# Altium PCB uShake.PcbDoc
Units mm, origin at the board's own origin, x right, y up, seen from the top; angles counter-clockwise.
Board outline 55 x 55 mm, 2 copper layers (Top Layer, Bottom Layer), stack 1.571 mm thick; 88 components, 61 nets, 307 pads, 105 vias.
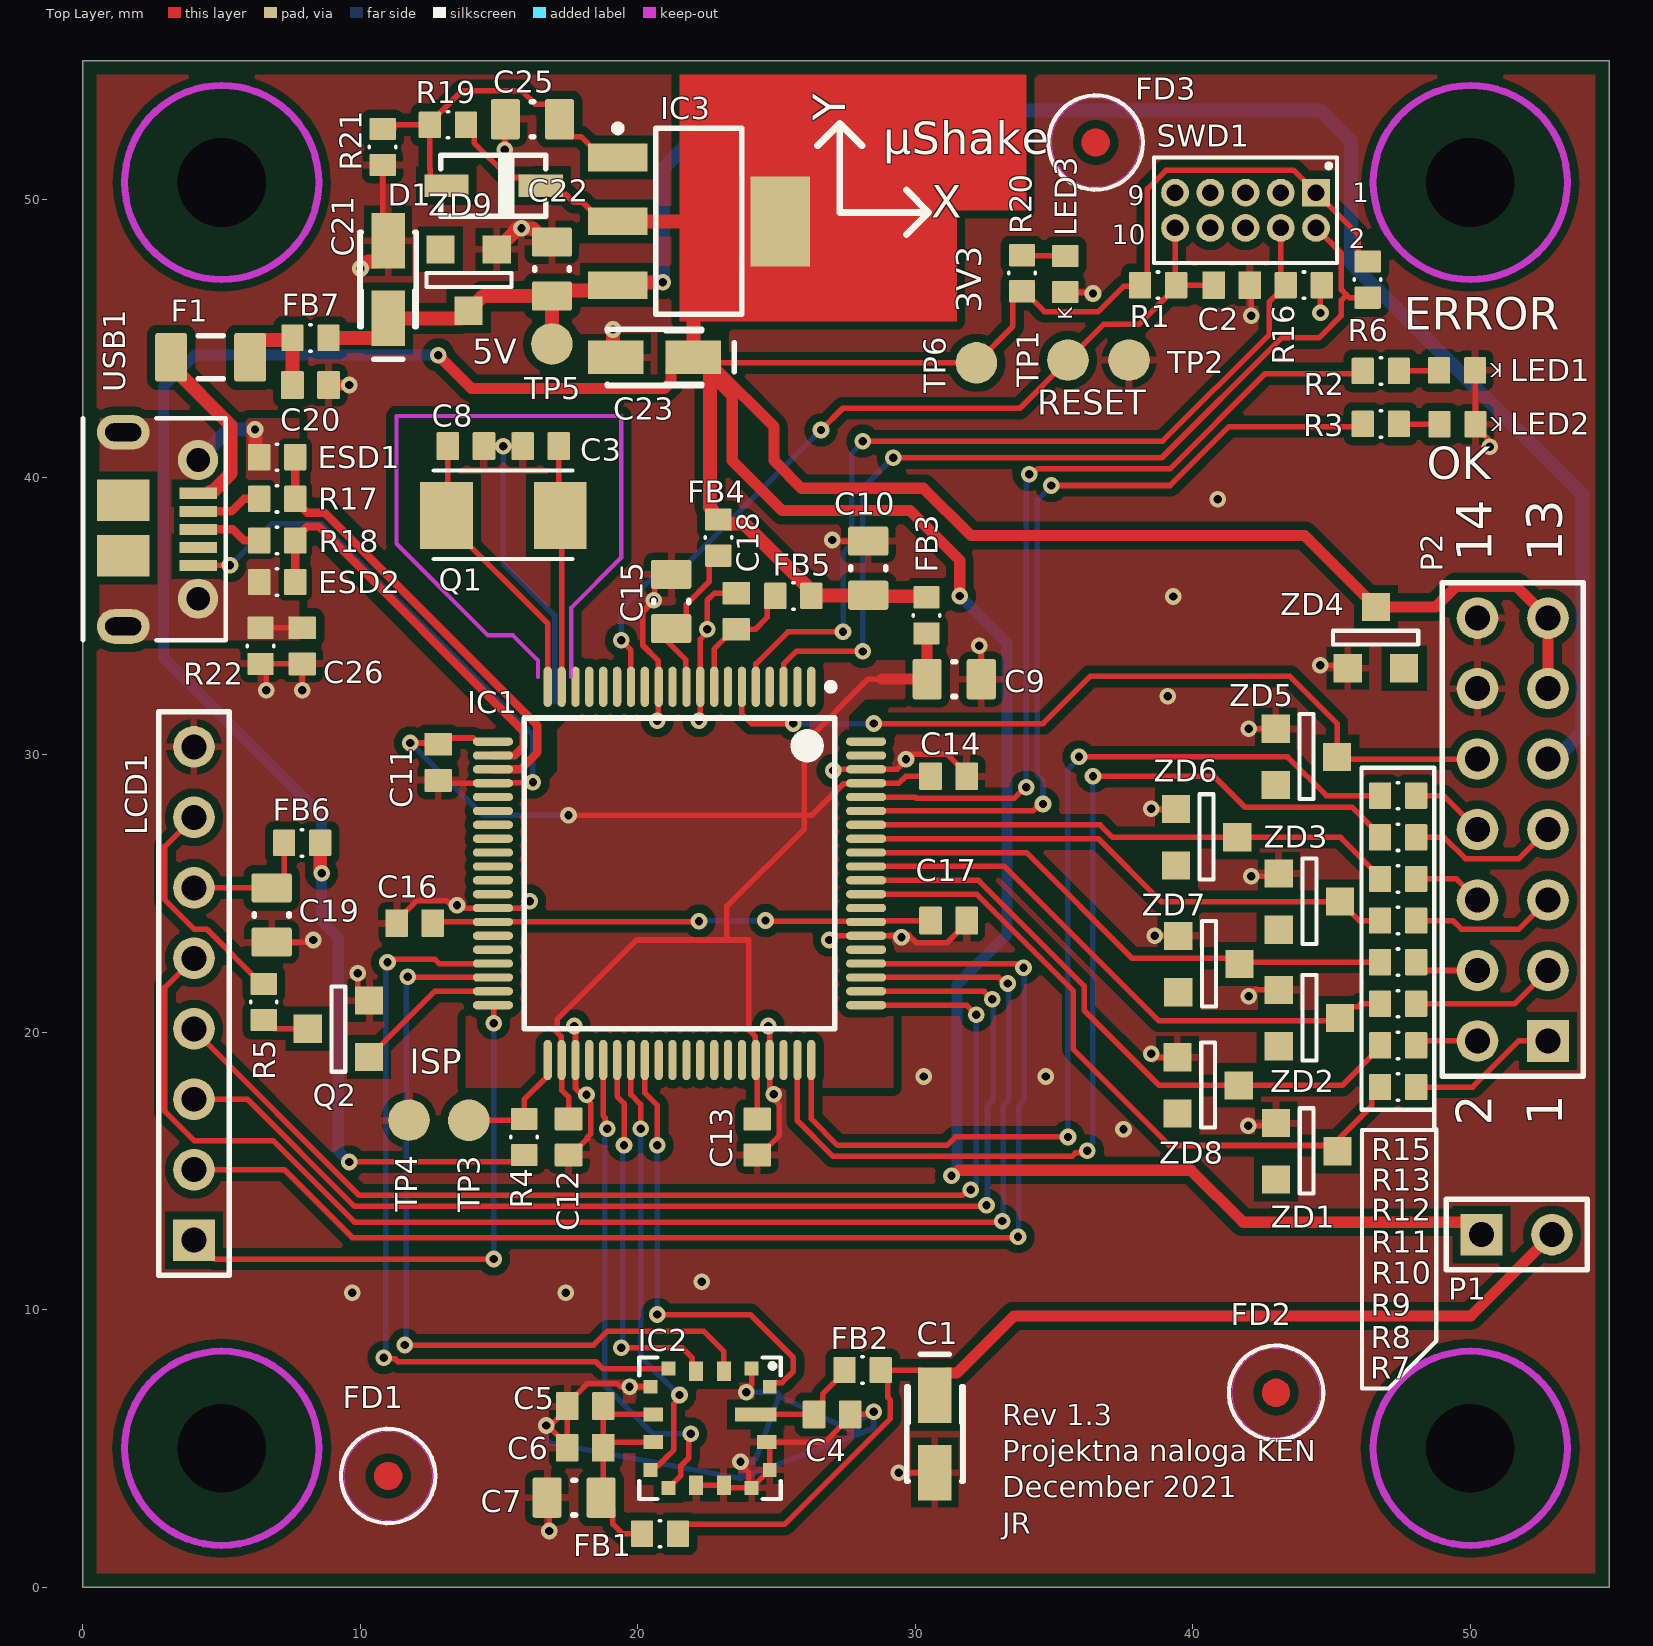
[diagram p0: Top Layer view]
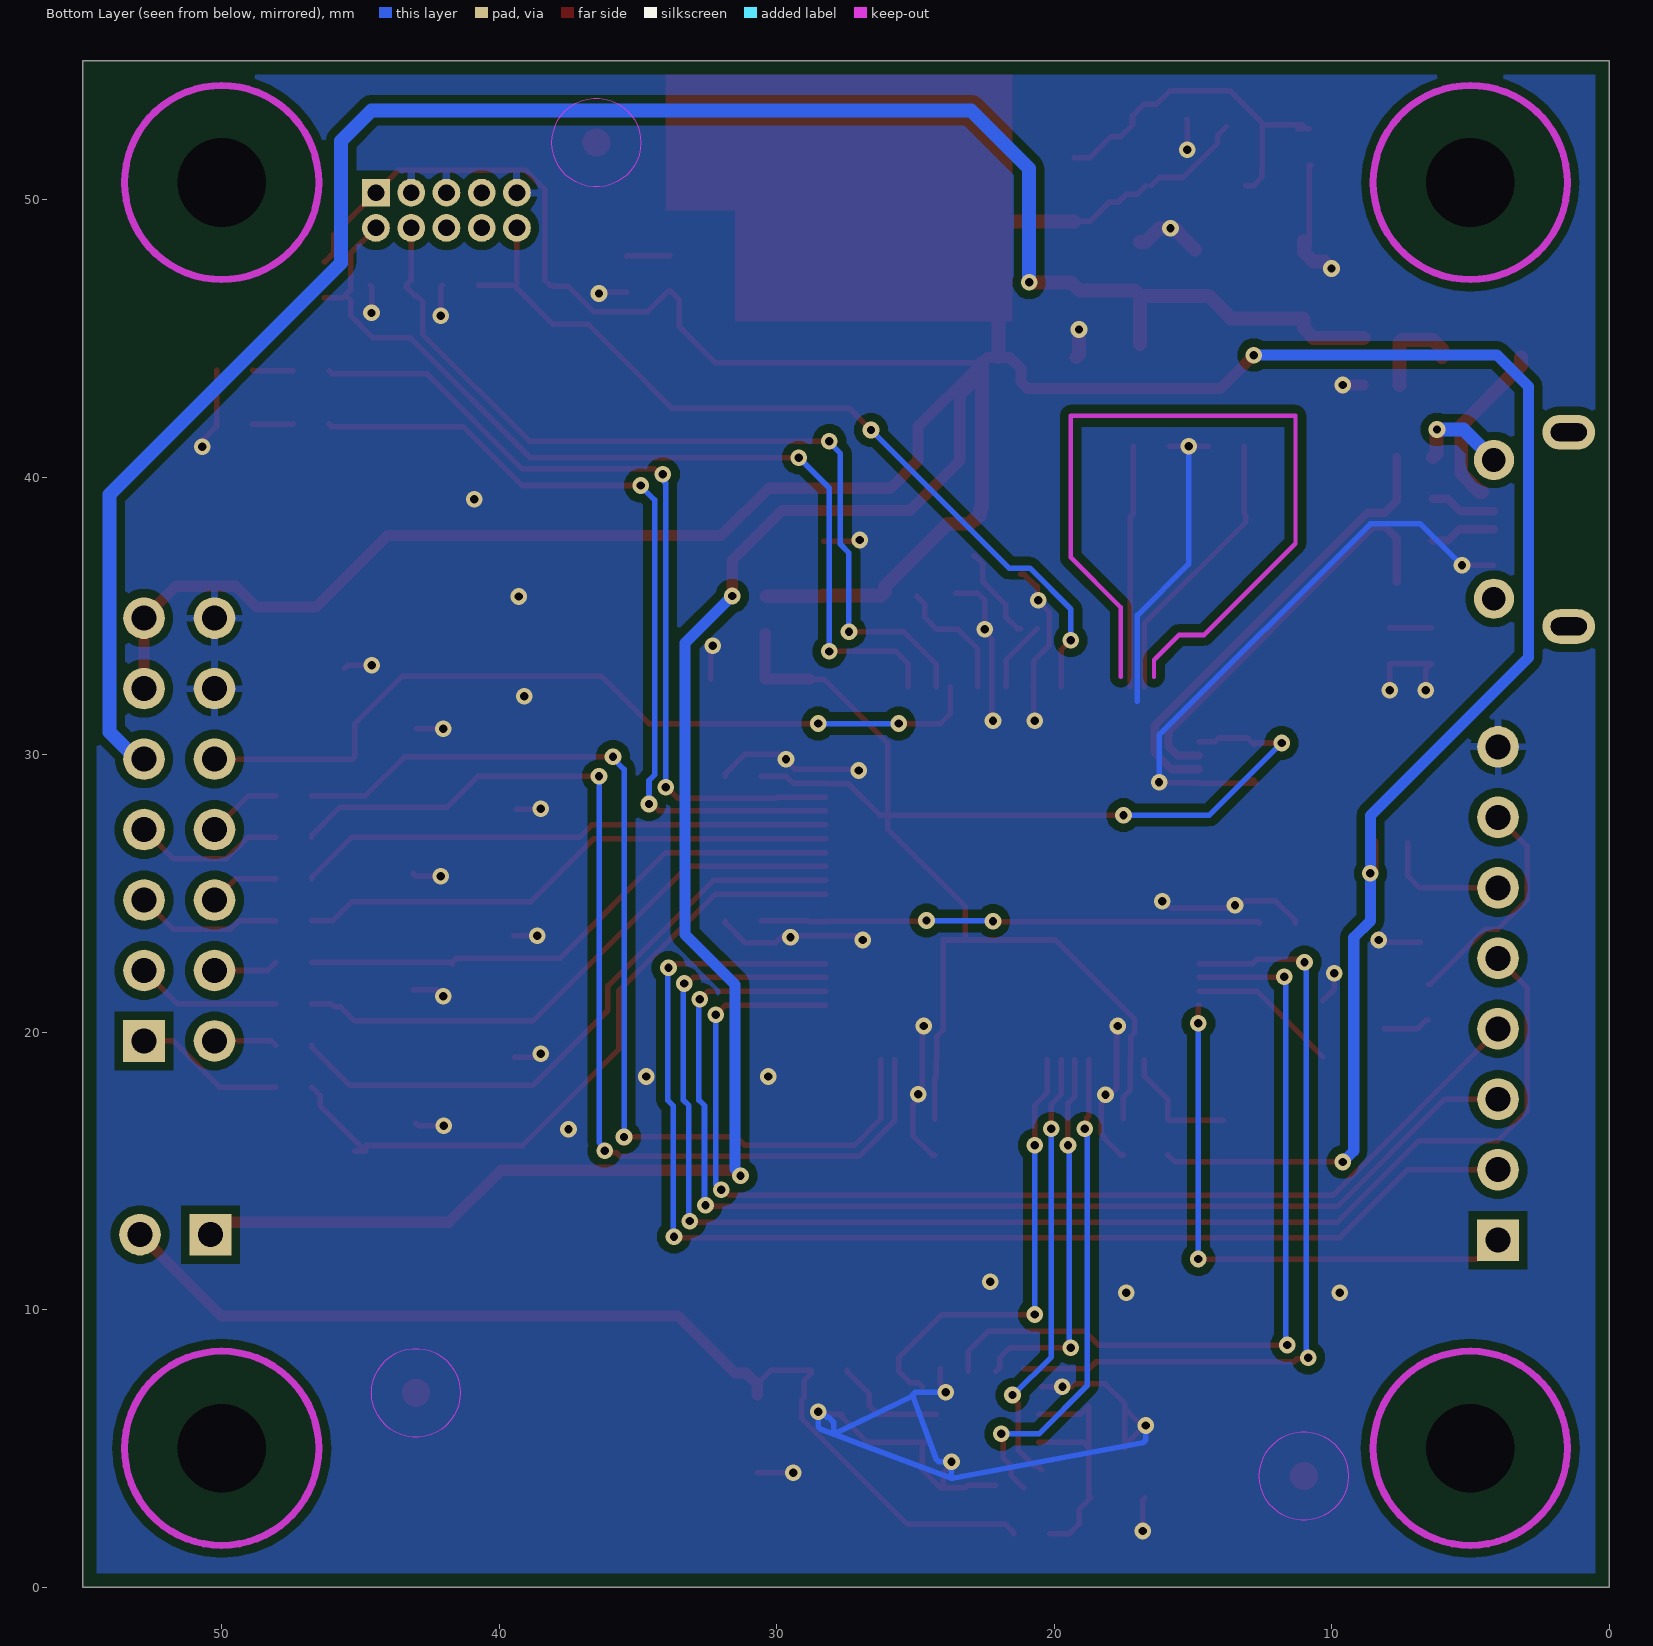
[diagram p1: Bottom Layer view, seen from below]

## Layer stack, top to bottom
Top Solder: solder mask 0.0102, Solder Resist, Dk 3.5
Top Layer: signal copper 0.0356
Dielectric 1: dielectric 1.5, FR-4, Dk 4.8
Bottom Layer: signal copper 0.0356
Bottom Solder: solder mask 0.0102, Solder Resist, Dk 3.5

## Board outline
0,0 0,55 55,55 55,0

## Design rules (kind name [scope] priority, off if disabled: settings)
Clearance Clearance_USB [(InDifferentialPairClass('All Differential Pairs'))] p1: gap=0.2 ignorepadtopadclearanceinfootprint=FALSE except(0.4: Track-Poly)
Clearance Plolygon_Clearance [InPolygon] p2: gap=0.3 ignorepadtopadclearanceinfootprint=TRUE
Clearance [All] p3: gap=0.2 ignorepadtopadclearanceinfootprint=TRUE
DiffPairsRouting [All] p1: maxlimit=0.5 minlimit=0.2 mostfreqgap=0.2 toplayer_minwidth=0.3 toplayer_maxwidth=0.381 toplayer_prefwidth=0.3 bottomlayer_minwidth=0.3 bottomlayer_maxwidth=0.381 bottomlayer_prefwidth=0.3 maxuncoupledlength=12.7
HoleSize [All] p1: absolutevalues=TRUE maxlimit=5 minlimit=0.3 maxpercent=80.000 minpercent=20.000
MatchedLengths MatchedLengths_USB [All] p1: tolerance=3 checknetsindiffpair=TRUE checkdiffpairvsdiffpair=FALSE checkxsignals=FALSE checkothers=FALSE
MinimumSolderMaskSliver [All] p1: minsoldermaskwidth=0.2
PolygonConnect PolygonConnect_SHLD [InNet('SHLD')] p1: connectstyle=Direct reliefconductorwidth=0.254 reliefentries=4 polygonreliefangle="90 Angle" airgapwidth=0.254
PolygonConnect [All] p2: thpad.connectstyle=Relief thpad.reliefconductorwidth=0.254 thpad.reliefentries=4 thpad.polygonreliefangle="90 Angle" thpad.airgapwidth=0.254 smdpad.connectstyle=Relief smdpad.reliefconductorwidth=0.254 smdpad.reliefentries=4 smdpad.polygonreliefangle="90 Angle" smdpad.airgapwidth=0.254 via.connectstyle=Direct via.reliefconductorwidth=0.254 via.reliefentries=4 via.polygonreliefangle="90 Angle" via.airgapwidth=0.254
RoutingVias [All] p1: holewidth=0.3 width=0.6 viastyle="Through Hole" minholewidth=0.3 minwidth=0.6 maxholewidth=0.8 maxwidth=1.3
SilkToSilkClearance [All] p1 off: silktosilkclearance=0.254
SolderMaskExpansion [All] p1: expansion=0.05 istentingtop=FALSE
Width [All] p1: maxlimit=5 minlimit=0.2 preferedwidth=0.2
26 further rules are at their usual default settings.

## Classes and differential pairs
component class uShake_POWER: C20 C21 C22 C23 C25 C26 D1 ESD1 ESD2 F1 FB7 IC3 LED3 R17 R18 R19 R20 R21 R22 TP5 TP6 USB1 ZD9
component class uShake_CPU: C1 C2 C3 C4 C5 C6 C7 C8 C9 C10 C11 C12 C13 C14 C15 C16 C17 C18 C19 FB1 FB2 FB3 FB4 FB5 FB6 FD1 FD2 FD3 IC1 IC2 LCD1 LED1 LED2 P1 P2 Q1 Q2 R1 R2 R3 R4 R5 R6 R7 R8 R9 R10 R11 R12 R13 R15 R16 SWD1 TP1 TP2 TP3 TP4 ZD1 ZD2 ZD3 ZD4 ZD5 ZD6 ZD7 ZD8
differential pair USB: +USB_P -USB_N
differential pair D: +D_P -D_N

## Components (designator, comment, footprint, x,y, rotation, side; value= is the part's Value field where it differs from the comment)
C1 "4u7" "Tantalum 3216" 30.7,5.52 r270 top
C2 "100n" SMD_C0603 41.4,46.92 r180 top
C3 "27p" SMD_C0603 16.5,41.12 r0 top
C4 "100n" SMD_C0603 27,6.22 r180 top
C5 "100n" SMD_C0603 18.1,6.52 r0 top
C6 "100n" SMD_C0603 18.1,5.02 r0 top
C7 "2u2" SMD_C0805 17.7,3.22 r0 top
C8 "27p" SMD_C0603 13.8,41.12 r180 top
C9 "2u2" SMD_C0805 31.4,32.72 r180 top
C10 "2u2" SMD_C0805 28.3,36.72 r270 top
C11 "100n" SMD_C0603 12.8,29.72 r90 top
C12 "100n" SMD_C0603 17.5,16.22 r90 top
C13 "100n" SMD_C0603 24.299,16.219 r90 top
C14 "100n" SMD_C0603 31.2,29.22 r180 top
C15 "2u2" SMD_C0805 21.2,35.52 r270 top
C16 "100n" SMD_C0603 11.954,23.926 r0 top
C17 "100n" SMD_C0603 31.2,24.02 r180 top
C18 "100n" SMD_C0603 23.547,35.165 r90 top
C19 "2u2" SMD_C0805 6.8,24.22 r90 top
C20 "10n" SMD_C0603 8.2,43.32 r180 top
C21 "4u7" "Tantalum 3216" 11,47.12 r90 top
C22 "2u2" SMD_C0805 16.9,47.5 r270 top
C23 "4u7" "Tantalum 3216" 20.6,44.32 r180 top
C25 "2u2" SMD_C0805 16.2,52.9 r0 top
C26 "10n" SMD_C0603 7.9,33.92 r90 top
D1 "BAT54T1G" SOD-123 14.8,50.5 r0 top
ESD1 "6V8" SMD_R0603 7,40.72 r0 top
ESD2 "6V8" SMD_R0603 7,36.22 r0 top
F1 "250mA" "PPTCF 1206" 4.6,44.32 r0 top
FB1 "600R@100MHz" SMD_R0603 20.8,1.92 r180 top
FB2 "600R@100MHz" SMD_R0603 28.1,7.82 r180 top
FB3 "600R@100MHz" SMD_R0603 30.4,35.02 r90 top
FB4 "600R@100MHz" SMD_R0603 22.9,37.82 r90 top
FB5 "600R@100MHz" SMD_R0603 25.6,35.72 r180 top
FB6 "600R@100MHz" SMD_R0603 7.9,26.82 r180 top
FB7 "600R@100MHz" SMD_R0603 8.2,45.02 r0 top
FD1 "Fiducial 1mm" FID1 11,4 r0 top
FD2 "Fiducial 1mm" FID1 43,7 r0 top
FD3 "Fiducial 1mm" FID1 36.5,52.06 r0 top
IC1 "LPC1756FBD80,551" LQFP80 21.5,25.72 r270 top locked
IC2 "IIS2ICLXTR" LGA-16L 22.6,5.72 r180 top
IC3 "LM317AEMP/NOPB" SOT-223 22.2,49.22 r0 top
LCD1 "NOKIA_LCD" NOKIA_LCD 4,21.39 r90 top locked
LED1 "green" SMD_LD0603 49.525,43.848 r180 top
LED2 "red" SMD_LD0603 49.542,41.907 r180 top
LED3 "green" SMD_LD0603 35.4,47.32 r90 top
P1 "Header 2" HDR1X2 51.675,12.7 r0 top
P2 "Header 7X2" HDR2X7 51.53,27.3 r90 top
Q1 "12MHz" QABM3 17.2,38.62 r180 top
Q2 "2N7002" SOT-23 10.31,19.104 r90 top
R1 "10k" SMD_R0603 38.75,46.92 r180 top
R2 "240R" SMD_R0603 46.775,43.829 r180 top
R3 "240R" SMD_R0603 46.775,41.92 r180 top
R4 "10k" SMD_R0603 15.9,16.22 r270 top
R5 "240R" SMD_R0603 6.514,21.082 r270 top
R6 "10k" SMD_R0603 46.3,47.12 r90 top
R7 "33R" SMD_R0603 47.4,18.02 r180 top
R8 "33R" SMD_R0603 47.4,19.52 r0 top
R9 "33R" SMD_R0603 47.4,21.02 r180 top
R10 "33R" SMD_R0603 47.4,22.52 r0 top
R11 "33R" SMD_R0603 47.4,24.02 r180 top
R12 "33R" SMD_R0603 47.4,25.52 r0 top
R13 "33R" SMD_R0603 47.4,27.02 r180 top
R15 "33R" SMD_R0603 47.4,28.52 r0 top
R16 "10k" SMD_R0603 44,46.92 r180 top
R17 "33R" SMD_R0603 7,39.22 r180 top
R18 "33R" SMD_R0603 7,37.72 r180 top
R19 "240R" SMD_R0603 13.15,52.7 r0 top
R20 "1k" SMD_R0603 33.845,47.351 r270 top
R21 "402R" SMD_R0603 10.8,51.9 r90 top
R22 "33R" SMD_R0603 6.4,33.92 r90 top
SWD1 "Header 5x2" 2X5_SWD_CON 41.9,49.62 r180 top
TP1 "TEST_PAD_1.5mm" TEST_PAD_1.5MM 35.5,44.22 r90 top
TP2 "TEST_PAD_1.5mm" TEST_PAD_1.5MM 37.7,44.22 r90 top
TP3 "TEST_PAD_1.5mm" TEST_PAD_1.5MM 13.908,16.82 r270 top
TP4 "TEST_PAD_1.5mm" TEST_PAD_1.5MM 11.75,16.829 r270 top
TP5 "TEST_PAD_1.5mm" TEST_PAD_1.5mm 16.9,44.8 r180 top
TP6 "TEST_PAD_1.5mm" TEST_PAD_1.5mm 32.2,44.12 r90 top
USB1 "105017-0001.." USB_MICRO_B 2.8,38.12 r270 top
ZD1 "6V8" SOT-23 43,16.72 r270 top
ZD2 "6V8" SOT-23 43.1,21.52 r270 top
ZD3 "6V8" SOT-23 43.1,25.72 r270 top
ZD4 "6V8" SOT-23 45.584,33.11 r0 top
ZD5 "6V8" SOT-23 42.99,30.936 r270 top
ZD6 "6V8" SOT-23 39.39,28.036 r270 top
ZD7 "6V8" SOT-23 39.477,23.468 r270 top
ZD8 "6V8" SOT-23 39.446,19.097 r270 top
ZD9 "6V8" SOT-23 14.916,48.21 r180 top

## Footprints (in the part's own frame and the unit in brackets; to place one, negate y for a bottom-side part, rotate by r counter-clockwise, add the part's x,y. Pads: shape width x height; smd on the part's side, far side on the other; paste and mask are expansions set on the pad)
2X5_SWD_CON [mm]
  rect 1x1 hole 0.6: 1(-2.54,-0.635)
  round 1 hole 0.6: 2(-2.54,0.635) 3(-1.27,-0.635) 4(-1.27,0.635) 5(0,-0.635) 6(0,0.635) 7(1.27,-0.635) 8(1.27,0.635) 9(2.54,-0.635) 10(2.54,0.635)
  silkscreen extent -3.3,-1.9 3.3,1.9, body extent -3.18,-1.7 3.18,1.7, height 5.31
FID1 [mm]
  Top Layer region: 0,-0.5 -0.099,-0.5 -0.283,-0.424 -0.424,-0.283 -0.5,-0.099 -0.5,0 -0.5,0.099 -0.424,0.283 -0.283,0.424 -0.099,0.5 0,0.5 0.099,0.5 0.283,0.424 0.424,0.283 0.5,0.099 0.5,0 0.5,-0.099 0.424,-0.283 0.283,-0.424 0.099,-0.5 0,-0.5
  Keep-Out Layer circle w0.01: c0,0 r1.6
  silkscreen extent -1.7,-1.7 1.7,1.7
HDR1X2 [mm] "Connector; Header; 2 Position"
  rect 1.5x1.5 hole 0.9: 1(-1.27,0)
  round 1.5 hole 0.9: 2(1.27,0)
  silkscreen extent -2.54,-1.27 2.54,1.27, body extent -2.54,-1.27 2.54,1.27, height 9.5
HDR2X7 [mm] "Connector; Header; 7x2 Position"
  rect 1.5x1.5 hole 0.9: 1(-7.62,-1.27)
  round 1.5 hole 0.9: 2(-7.62,1.27) 3(-5.08,-1.27) 4(-5.08,1.27) 5(-2.54,-1.27) 6(-2.54,1.27) 7(0,-1.27) 8(0,1.27) 9(2.54,-1.27) 10(2.54,1.27) 11(5.08,-1.27) 12(5.08,1.27) 13(7.62,-1.27) 14(7.62,1.27)
  silkscreen extent -8.89,-2.54 8.89,2.54, body extent -8.89,-2.54 8.89,2.54, height 9.5
LGA-16L [mm]
  rect 1.5x0.5 smd mask+0.05: 1(-1.65,-0.5)
  rect 0.5x0.5 smd mask+0.05: 2(-2.15,-1.5) 3(-1.5,-2.15) 6(1.5,-2.15) 7(2.15,-1.5) 10(2.15,1.5) 11(1.5,2.15) 14(-1.5,2.15) 15(-2.15,1.5)
  rect 0.5x0.7 smd mask+0.05: 4(-0.5,-2.05) 5(0.5,-2.05) 12(0.5,2.05) 13(-0.5,2.05)
  rect 0.7x0.5 smd mask+0.05: 8(2.05,-0.5) 9(2.05,0.5) 16(-2.05,0.5)
  silkscreen extent -2.55,-2.55 2.55,2.55, body extent -2.5,-2.5 2.5,2.5, height 1.7
LQFP80 [mm] "TSQFP, 80-Leads, Body 12,00x12,00mm, Pitch 0,50mm, IPC Medium Density"
  oval 1.45x0.3 smd: 1(-6.725,4.75) 2(-6.725,4.25) 3(-6.725,3.75) 4(-6.725,3.25) 5(-6.725,2.75) 6(-6.725,2.25) 7(-6.725,1.75) 8(-6.725,1.25) 9(-6.725,0.75) 10(-6.725,0.25) 11(-6.725,-0.25) 12(-6.725,-0.75) 13(-6.725,-1.25) 14(-6.725,-1.75) 15(-6.725,-2.25) 16(-6.725,-2.75) 17(-6.725,-3.25) 18(-6.725,-3.75) 19(-6.725,-4.25) 20(-6.725,-4.75) 41(6.725,-4.75) 42(6.725,-4.25) 43(6.725,-3.75) 44(6.725,-3.25) 45(6.725,-2.75) 46(6.725,-2.25) 47(6.725,-1.75) 48(6.725,-1.25) 49(6.725,-0.75) 50(6.725,-0.25) 51(6.725,0.25) 52(6.725,0.75) 53(6.725,1.25) 54(6.725,1.75) 55(6.725,2.25) 56(6.725,2.75) 57(6.725,3.25) 58(6.725,3.75) 59(6.725,4.25) 60(6.725,4.75)
  oval 0.3x1.45 smd: 21(-4.75,-6.725) 22(-4.25,-6.725) 23(-3.75,-6.725) 24(-3.25,-6.725) 25(-2.75,-6.725) 26(-2.25,-6.725) 27(-1.75,-6.725) 28(-1.25,-6.725) 29(-0.75,-6.725) 30(-0.25,-6.725) 31(0.25,-6.725) 32(0.75,-6.725) 33(1.25,-6.725) 34(1.75,-6.725) 35(2.25,-6.725) 36(2.75,-6.725) 37(3.25,-6.725) 38(3.75,-6.725) 39(4.25,-6.725) 40(4.75,-6.725) 61(4.75,6.725) 62(4.25,6.725) 63(3.75,6.725) 64(3.25,6.725) 65(2.75,6.725) 66(2.25,6.725) 67(1.75,6.725) 68(1.25,6.725) 69(0.75,6.725) 70(0.25,6.725) 71(-0.25,6.725) 72(-0.75,6.725) 73(-1.25,6.725) 74(-1.75,6.725) 75(-2.25,6.725) 76(-2.75,6.725) 77(-3.25,6.725) 78(-3.75,6.725) 79(-4.25,6.725) 80(-4.75,6.725)
  silkscreen extent -6.85,-5.6 5.6,5.6, body extent -6.9,-6.9 6.9,6.9, height 1.6
NOKIA_LCD [mm] "Connector; Header; 8 Position"
  rect 1.5x1.5 hole 0.9: 1(-8.89,0)
  round 1.5 hole 0.9: 2(-6.35,0) 3(-3.81,0) 4(-1.27,0) 5(1.27,0) 6(3.81,0) 7(6.35,0) 8(8.89,0)
  silkscreen extent -10.16,-1.27 10.16,1.27, body extent -21.14,-42.5 21.36,3.5, height 9.5
"PPTCF 1206" [mm] "PPTC fuse 2-Leads, Body 3.15x1.60mm, IPC Medium Density"
  rrect15% 1.15x1.75 smd: 1(-1.425,0) 2(1.425,0)
  silkscreen extent -0.45,-0.77 0.45,0.77, body extent -1.6,-0.82 1.6,0.83, height 0.59
QABM3 [mm]
  rect 1.9x2.4 smd: 1(0,0) 2(4.1,0)
  silkscreen extent -0.44,-1.63 4.56,1.57
SMD_C0603 [mm]
  rrect10% 0.82x1 smd: 1(-0.65,0) 2(0.65,0)
  body extent -0.82,-0.48 0.82,0.48, height 0.95
SMD_C0805 [mm] "Chip Capacitor, 2-Leads, Body 2.05x1.25mm, IPC Medium Density"
  rrect15% 1.05x1.45 smd: 1(-0.975,0) 2(0.975,0)
  silkscreen extent -0.05,-0.63 0.05,0.63, body extent -1.1,-0.7 1.1,0.7, height 1.4
SMD_LD0603 [mm]
  rrect10% 0.8x0.95 smd: 1(-0.65,0) 2(0.65,0)
  body extent -0.8,-0.4 0.8,0.4, height 0.7
SMD_R0603 [mm]
  rrect10% 0.8x0.95 smd: 1(-0.65,0) 2(0.65,0)
  silkscreen extent -0.03,-0.48 0.03,0.48, body extent -0.82,-0.48 0.82,0.48, height 0.5
SOD-123 [mm] "SOD-123; 2 Leads; Body 2.7 x 1.6 mm, (LxW)"
  rect 1.6x0.8 smd: 1(1.7,0) 2(-1.7,0)
  silkscreen extent -1.91,-1.1 1.88,1.1, body extent -1.88,-0.85 1.88,0.85, height 1.2
SOT-23 [mil]
  rect 40x40 smd: 1(0,0) 2(80,0) 3(40,87)
  silkscreen extent -21,34 100,53, body extent -18,-6 97,92, height 39
SOT-223 [mm] "SOT223, 4-Leads, Body 6.5x3.5mm, Pitch 2.3mm, Lead Span 7mm, IPC Medium Density"
  rect 2.15x1 smd: 1(-2.925,2.3) 2(-2.925,0) 3(-2.925,-2.3)
  rect 2.15x3.25 smd: 4(2.925,0)
  silkscreen extent -3.05,-3.35 1.55,3.47, body extent -3.5,-3.35 3.5,3.35, height 1.8
"Tantalum 3216" [mm]
  rect 2x1.2 smd: 1(-1.4,0) 2(1.4,0)
  silkscreen extent -2.87,-1.02 1.7,1.02, body extent -1.66,-0.86 1.74,0.94, height 1.8
TEST_PAD_1.5MM [mm]
  round 1.5 smd: 1(0,0)
TEST_PAD_1.5mm [mm]
  round 1.5 smd: 1(0,0)
USB_MICRO_B [mm] "part num: 105017-0001.."
  rect 1.5x1.9 smd: 0(-1.05,-1.35) 0(0.95,-1.35)
  rect 0.4x1.35 smd: 1(-1.3,1.35) 2(-0.65,1.35) 3(0,1.35) 4(0.65,1.35) 5(1.3,1.35)
  oval 1.25x1.9 hole 0.65 slot 1.3 at 90 deg: 6(-3.5,-1.35) 7(3.5,-1.35)
  round 1.45 hole 0.85: 8(2.5,1.35) 9(-2.5,1.35)
  silkscreen extent -4,-2.8 4,2.35, body extent -4.1,-3.9 4.1,1.5, height 2.78

## Part data
C1 C21 C23: library part "Capacitor - polarized", "Generic polarized capacitor"
C2 C3 C4 C5 C6 C7 C8 C9 C10 C11 C12 C13 C14 C15 C16 C17 C18 C19 C20 C22 C25 C26: library part CAP, "Capacitor", properties=capacitor
D1: library part DIODE_SCHOTTKY, Manufacturer="ON SEMICONDUCTOR", farnellCode=1651157, partnumber=BAT54T1G, properties="Small Signal Schottky Diode, Single, 30 V, 200 mA, 350 mV, 600 mA, 150 °C"
ESD1 ESD2: library part ZenerDiode, "ESD Protection device", Manufacturer="ON Semiconductor", partnumber=BZX84C6V8LT1G, farnellCode=1651587, properties="Zener Single Diode, 6.8 V, 225 mW, SOT-23, 6 %, 3 Pins, 150 °C"
F1: library part PolyFuse, "Resettable Fuse, PPTC, 1206 (3216 Metric), POLYFUSE 1206L Series, 16 VDC, 250 mA, 500 mA, 0.08 s", Manufacturer=Littelfuse, Manufacturer Number=2920L030DR, Max voltage=16V, Resistance=2.3Ω, Trip current=500mA, Category=Fuses, Dealer=Farnell, Dealer number=1596990, HelpURL=https://www.farnell.com/datasheets/683946.pdf, Holing current=250mA, Price=0.46, Technology=SMT, Type="Poly fuse"
FB1 FB2 FB3 FB4 FB5 FB6 FB7: library part FB, "Ferrite bead"
FD1 FD2 FD3: library part FIDUCIAL, Category=Fiducials
IC1: library part LPC1756FBD80, "LPC1756FBD80", Manufacturer=NXP, partnumber=LPC1756FBD80,551, properties="Scalable Mainstream 32-bit Microcontroller (MCU) based on ARM Cortex-M3 Core"
IC2: Manufacturer=STM, partnumber=IIS2ICLXTR, properties="Inclinometers High-accuracy, high-resolution, low-power, 2-axis digital inclinometer with embedded Machine Learning Core"
IC3: library part LM317KC, "3-Terminal Adjustable Regulator", Manufacturer="TEXAS INSTRUMENTS", farnellCode=3122676, partnumber=LM317AEMP/NOPB, properties="Linear Voltage Regulator, Adjustable Positive, 40V primary input, 1.2V to 37V/1A/1 Output, SOT-223-4"
LED1 LED2 LED3: library part LED
P1: "Header, 2-Pin", LatestRevisionDate=17-Jul-2002, LatestRevisionNote="Re-released for DXP Platform.", Publisher="Altium Limited"
P2: "Header, 7-Pin, Dual row", LatestRevisionDate=17-Jul-2002, LatestRevisionNote="Re-released for DXP Platform.", Publisher="Altium Limited"
Q1: library part Crystal, "Crystal", Manufacturer=ABRACON, partnumber=ABM3-12.000MHZ-D2Y-T, properties="Crystal, 12 MHz, SMD, 5mm x 3.2mm, 30 ppm, 18 pF, 20 ppm, ABM3 Series"
Q2: library part N-MOSFET, "Power MOSFET, N Channel, 60 V, 300 mA, 2.8 ohm, SOT-23, Surface Mount", Case=SOT23-3, Manufacturer=NXP, Max current=0.3A, Max power disipation=830mW, Max voltage=60V, Category=MOSFETs, Dealer=Farnell, Dealer number=1510761, HelpURL=https://www.farnell.com/datasheets/1499179.pdf, Logic level=Yes, Manufacturer Number=2N7002, Price=0.039, RDS=2.8Ω, SKU=5000000000001, Technology=SMT, Type="N-enhancment mode"
R1 R2 R3 R4 R5 R6 R7 R8 R9 R10 R11 R12 R13 R15 R16 R17 R18 R19 R20 R21 R22: library part RESISTOR, properties=resistor
SWD1: library part "Header 5X2", "Header, 5-Pin, Dual row", Manufacturer=HARWIN, partnumber=M50-3500542, farnellCode=1022305, properties="Board-To-Board Connector, 1.27 mm, 10 Contacts, Header, Archer M50 Series, Through Hole, 2 Rows"
TP1 TP2 TP3 TP4 TP5 TP6: library part TEST_PAD
USB1: library part Micro_USB_MIUSB-F5M-BB-U, Manufacturer=MOLEX, farnellCode=2293836, partnumber=105017-0001.., properties="USB Connector, Micro USB Type B, USB 2.0, Receptacle, 5 Ways, Surface Mount, Right Angle"
ZD1 ZD2 ZD3 ZD4 ZD5 ZD6 ZD7 ZD8 ZD9: library part ZenerDiode, "Zener Diode", Manufacturer="ON Semiconductor", partnumber=BZX84C6V8LT1G, farnellCode=1651587, properties="Zener Single Diode, 6.8 V, 225 mW, SOT-23, 6 %, 3 Pins, 150 °C"

## Free pads (board coordinates)
  rect 0x0 hole 3.2 unplated mask+0.05: 0(5,5) 0(5,50.62) 0(50,5) 0(50,50.62)

## Via types
v1: diameter 0.6, hole 0.3, Top Layer to Bottom Layer, tented both sides, 105 vias

## Nets (pads, with @x,y where several pads share a name; then routed paths per layer and width w, separated by ;. In a path a pad name is that pad's centre, name@x,y a point inside that pad or via, vN(x,y) a via of type N, cw(c..) or ccw(c..) an arc to the next point about the centre after c; other vN are vias at no path point)
3V3: C10.2 C23.1 D1.1 FB3.2 FB4.2 FB5.1 FB6.1 IC3.2 IC3.4 P1.1 P2.11 P2.13 R1.2 R4.2 R6.2 R19.2 R20.2 SWD1.1 TP6.1 ZD4.3 | length 214.7
  Top Layer w0.2: v1(9.6,15.32) 15.65,15.32 R4.2 ; R19.2@13.8,52.625 14.1,52.325 14.1,52.051 15.351,50.8 16.2,50.8 D1.1 ; D1.1@16.7,50.5 17.005,50.195 17.4,50.195 17.687,49.908 18.012,49.908 18.7,49.22 IC3.2 ; C23.1@22.6,44.12 TP6.1 33.51,45.43 33.51,46.401 33.81,46.701 R20.2 33.92,46.701 34.651,45.97 36.599,45.97 37.517,46.889 38.069,46.889 R1.2 ; FB3.2@30.375,35.695 FB3.2 ; R1.2@38.175,46.92 38.36,47.105 38.36,50.386 39.029,51.055 43.64,51.055 SWD1.1 45.965,48.73 45.965,48.07 46.265,47.77 R6.2
  Top Layer w0.4: v1(12.8,44.4) 14,43.2 20.966,43.2 21.2,43.434 21.2,43.92 21.6,44.32 C23.1 22.4,44.32 C23.1@22.6,44.12 ; 22.8,43.52 23.4,42.92 23.4,40.6 25.2,38.8 29.8,38.8 31.6,37 v1(31.6,35.72) ; C23.1@22.8,43.92 24.9,41.82 24.9,40.6 25.9,39.6 30.3,39.6 32,37.9 44.02,37.9 ZD4.3 48.755,35.32 49.505,36.07 51.65,36.07 P2.13 P2.11 ; FB3.2@30.363,35.707 FB3.2@30.375,35.695 ; 31.554,15.02 39.93,15.02 41.804,13.147 49.958,13.147 P1.1
  Top Layer w0.5: FB6.1 8.55,25.797 8.6,25.747 v1(8.6,25.72) ; IC3.2 IC3.4 ; C23.1 22,45.7 22.7,46.4 ; C23.1@22.6,44.12 22.6,38.913 22.675,38.838 22.675,38.62 22.825,38.47 FB4.2 23.05,38.32 23.838,38.32 26.1,36.058 26.1,35.87 FB5.1 26.263,35.732 28.287,35.732 C10.2 28.337,35.707 FB3.2@30.363,35.707
  Bottom Layer w0.4: v1(9.6,15.32) 9.2,15.72 9.2,23.41 8.6,24.01 v1(8.6,25.72) 8.6,27.8 2.9,33.5 2.9,43.266 4.034,44.4 v1(12.8,44.4) ; v1(31.3,14.82) 31.3,14.874 31.5,15.074 31.5,21.72 33.3,23.52 33.3,34.02 v1(31.6,35.72)
3V3_ACCEL: C1.1 FB1.1 FB2.1 P1.2 | length 38.7
  Top Layer w0.2: FB1.1 21.45,1.955 21.75,2.255 25.284,2.255 29.1,6.071 29.1,6.733 29.01,6.823 29.01,7.445 28.75,7.705 FB2.1 30.2,7.82 30.7,7.32 C1.1
  Top Layer w0.4: C1.1 30.7,7.32 31.1,7.72 31.5,7.72 33.552,9.772 50.017,9.772 P1.2
5V_USB: C21.1 C22.2 FB7.2 IC3.3 P2.9 TP5.1 ZD9.3 | length 71.9
  Top Layer w0.5: FB7.2 10.65,45.02 11,45.37 C21.1 ZD9.3@13.62,45.72 ; C22.2@16.702,46.525 14.425,46.525 ZD9.3 ; TP5.1 C22.2 17.097,46.722 IC3.3@19.077,46.722 ; IC3.3 IC3.3@19.077,46.722 ; v1(20.9,47.02) 19.375,47.02 IC3.3@19.077,46.722 ; ZD9.3@13.62,45.72 ZD9.3 ; ZD9.3@13.62,45.72 ZD9.3
  Bottom Layer w0.5: v1(20.9,47.02) 20.9,51.12 23,53.22 44.6,53.22 45.7,52.12 45.7,47.72 54.046,39.374 54.046,30.816 53.071,29.84 P2.9
AOUT: IC1.6 P2.10 ZD5.3 | length 30.3
  Top Layer w0.2: IC1.6 23.75,31.47 24.1,31.12 v1(25.6,31.12) ; v1(28.5,31.12) 34.6,31.12 36.3,32.82 43.5,32.82 45.2,31.12 ZD5.3 45.28,29.84 P2.10
  Bottom Layer w0.2: v1(25.6,31.12) v1(28.5,31.12)
D_N: R17.2 USB1.2 | length 2.4
  Top Layer w0.3: USB1.2 5.35,38.77 5.8,39.22 R17.2
D_P: R18.2 USB1.3 | length 2.4
  Top Layer w0.3: USB1.3 5.4,38.12 5.8,37.72 R18.2
GND: C1.2 C2.1 C3.1 C4.1 C5.1 C6.1 C7.1 C8.1 C9.1 C10.1 C11.1 C12.1 C13.1 C14.1 C15.1 C16.1 C17.1 C18.2 C19.1 C20.1 C21.2 C22.1 C23.2 C25.1 C26.1 IC1.9 IC1.12 IC1.24 IC1.33 IC1.43 IC1.57 IC1.66 IC1.78 IC2.3 IC2.7 IC2.12 IC2.13 IC2.14 IC2.15 IC2.16 LCD1.8 LED1.1 LED2.1 LED3.1 P2.12 P2.14 Q2.2 R16.1 R21.1 R22.1 SWD1.3 SWD1.5 SWD1.9 TP2.1 TP4.1 USB1.5 ZD1.1 ZD2.1 ZD3.1 ZD4.1 ZD5.1 ZD6.1 ZD7.1 ZD8.1 ZD9.1 | length 147.6
  Top Layer w0.2: USB1.5 v1(5.3,36.82) ; v1(6.6,32.32) 6.6,33.07 R22.1 C26.1 v1(7.9,32.32) ; C19.1 8.225,23.245 v1(8.3,23.32) ; v1(9.9,22.12) 9.902,22.118 9.902,21.544 Q2.2 ; R21.1@10.725,51.25 R21.1 10.8,48.32 C21.2@11,48.12 ; C16.1 11.304,24.016 12.014,24.726 13.115,24.726 13.371,24.47 v1@13.69,24.47 ; C11.1@12.71,28.97 IC1.24 14.792,28.987 16.2,28.987 v1(16.216,29.003) ; C11.1 C11.1@12.89,29.07 ; v1(13.482,24.57) 13.59,24.57 v1@13.69,24.47 ; C8.1 v1(15.15,41.12) C3.1 ; v1(15.2,51.8) 15.2,52.875 C25.1 ; v1(16.1,24.72) 16.048,24.72 15.798,24.47 v1@13.69,24.47 ; C7.1 16.8,3.145 v1(16.8,2.02) ; C6.1 C6.1@17.45,5.11 ; C12.1 17.59,15.57 18.183,16.163 18.183,16.217 18.3,16.334 18.3,17.427 v1@18.025,17.702 ; v1(17.7,20.22) 17.75,20.17 IC1.43 17.75,17.977 v1@18.025,17.702 ; v1(18.149,17.745) 18.106,17.702 v1@18.025,17.702 ; v1@19.8,7.22 v1(19.7,7.22) ; IC2.7 v1(19.7,7.22) ; v1(20.7,31.22) 20.731,31.251 20.731,32.426 IC1.12 20.731,32.464 20.731,33.386 20.175,33.942 20.175,35.148 20.573,35.547 v1(20.573,35.57) 20.614,35.61 20.614,36.07 20.654,36.07 21.079,36.495 C15.1 ; IC2.12 IC2.13 23.2,3.57 IC2.14 ; v1(22.2,31.22) 22.25,31.27 22.25,34.162 22.5,34.412 22.5,35.569 22.747,35.815 C18.2 ; v1(23.7,4.52) 23.7,4.412 23.992,4.12 23.992,3.678 IC2.14 ; v1(23.9,7.02) 23.9,7.122 24.1,7.322 IC2.3 ; C13.1 24.389,15.569 25.099,16.279 25.099,17.379 v1@24.75,17.728 ; v1(24.7,20.22) 24.7,20.12 24.75,20.07 IC1.57 v1@24.75,17.728 ; v1(24.899,17.76) 24.867,17.728 v1@24.75,17.728 ; v1(26.9,23.32) 27.008,23.32 27.158,23.47 v1@29.55,23.47 ; v1(27.006,37.737) 27.048,37.695 C10.1 ; v1(27.037,29.43) 27.077,29.47 IC1.78 29.343,29.47 v1@29.663,29.79 ; v1(28.5,6.32) 28.4,6.22 C4.1 27.65,6.13 26.74,5.22 IC2.16 24.75,5.12 IC2.15 IC2.14 ; v1(29.4,4.12) C1.2 ; v1(29.5,23.42) v1@29.55,23.47 ; v1(29.663,29.834) v1@29.663,29.79 ; C17.1 31.85,23.93 31.14,23.22 30.04,23.22 29.79,23.47 v1@29.55,23.47 ; C14.1 31.85,29.31 31.14,30.02 29.893,30.02 v1@29.663,29.79 ; v1(32.3,33.92) 32.375,33.845 C9.1 ; LED3.1 36.35,46.67 v1(36.4,46.62) ; v1(38.499,28.053) 38.516,28.036 ZD6.1 ; v1(38.5,19.22) 38.623,19.097 ZD8.1 ; v1(38.631,23.469) 38.633,23.468 ZD7.1 ; v1(42,16.62) 42.9,16.62 ZD1.1 ; v1@42,30.92 v1(42.016,30.936) ZD5.1 ; v1(42.01,21.295) 42.235,21.52 ZD2.1 ; C2.1 42.1,46.87 v1(42.1,45.82) ; v1(42.1,25.62) 43,25.62 ZD3.1 ; v1(44.592,33.22) 45.474,33.22 ZD4.1 ; v1(44.6,45.92) 44.6,46.87 R16.1 ; LED1.1 50.183,43.84 50.183,41.841 50.623,41.401 50.623,41.177 v1(50.7,41.1) ; LED2.1@50.183,41.916 LED2.1 ; v1(16.7,5.82) 16.777,5.897 16.917,5.897 C5.1@17.45,6.43 ; v1(16.7,5.82) 16.74,5.82 v1@16.79,5.77 ; v1(16.7,5.82) 16.75,5.77 v1@16.79,5.77 ; v1@16.79,5.77 C6.1@17.45,5.11 ; C6.1@17.45,5.11 C5.1@17.45,6.43 ; C5.1@17.45,6.43 C5.1 17.45,6.61 18.16,7.32 19.26,7.32 19.36,7.22 v1(19.7,7.22)
  Top Layer w0.4: C20.1 v1(9.6,43.32)
  Top Layer w0.5: v1(10,47.52) 10.027,47.52 10.277,47.77 10.65,47.77 11,48.12 C21.2 ; ZD9.1 15.528,48.821 15.528,48.86 15.625,48.957 15.787,48.957 15.816,48.986 15.844,48.957 16.218,48.957 16.7,48.475 C22.1 ; v1(19.1,45.32) 19.1,44.42 C23.2
  Bottom Layer w0.2: v1(5.3,36.82) 6.8,38.32 8.6,38.32 16.216,30.704 v1(16.216,29.003) ; v1(15.15,41.12) 15.15,36.87 17,35.02 17,31.92 ; v1(16.7,5.82) 16.7,5.294 16.759,5.236 16.802,5.192 23.651,3.92 ; v1(23.9,7.02) 24.996,7.02 25.086,6.93 ; 25.09,6.889 27.934,5.508 ; 25.1,6.916 25.081,6.865 24.243,4.609 24.154,4.52 v1(23.7,4.52) 23.7,3.92 26.93,5.131 27.928,5.506 27.934,5.508 ; 28.441,5.717 28.411,5.687 27.934,5.508 ; 28.441,5.717 28.5,5.776 28.5,5.859 v1(28.5,6.32) 28.392,6.32 28.192,6.12 28.134,6.12 27.934,5.919 27.934,5.508
  other v1: 9.7,10.6 17.4,10.6 22.3,11 37.5,16.5 30.3,18.4 34.7,18.4 39.1,32.1 22.5,34.52 39.3,35.7 40.9,39.2 15.806,48.976
INT1: IC1.37 IC2.6 | length 28.6
  Top Layer w0.2: v1(10.841,8.267) 10.884,8.224 11.247,8.224 11.351,8.12 18.48,8.12 18.73,7.87 IC2.6 ; v1(10.975,22.52) 11.084,22.52 11.184,22.62 12.687,22.62 12.837,22.47 IC1.37
  Bottom Layer w0.2: v1(10.841,8.267) 10.908,8.334 10.908,22.453 v1(10.975,22.52)
INT2: IC1.38 IC2.4 | length 29.1
  Top Layer w0.2: v1(11.6,8.72) 18.4,8.72 18.9,9.22 22.366,9.22 23.1,8.486 IC2.4 ; v1(11.7,22) 11.73,21.97 IC1.38
  Bottom Layer w0.2: v1(11.6,8.72) 11.65,8.77 11.65,21.95 v1(11.7,22)
ISP_ENABLE: IC1.41 R4.1 TP3.1 | length 4.5
  Top Layer w0.2: TP3.1 15.85,16.82 R4.1 15.9,17.57 16.75,18.42 IC1.41
LCD_D/C\: IC1.62 LCD1.3 | length 42.4
  Top Layer w0.2: LCD1.3 5.926,17.58 9.786,13.72 32.531,13.72 v1(32.566,13.754) ; IC1.62 32.481,21.47 v1(32.766,21.186)
  Bottom Layer w0.2: v1(32.566,13.754) 32.6,13.789 32.6,17.349 32.8,17.549 32.8,21.151 v1(32.766,21.186)
LCD_LED: IC1.39 Q2.1 | length 5.4
  Top Layer w0.2: Q2.1 12.676,21.47 IC1.39
LCD_MOSI: IC1.61 LCD1.4 | length 41.1
  Top Layer w0.2: LCD1.4 4,20.071 9.951,14.12 31.692,14.12 31.892,14.32 v1(32,14.32) ; IC1.61 31.85,20.97 v1(32.2,20.62)
  Bottom Layer w0.2: v1(32,14.32) 32.2,14.52 v1(32.2,20.62)
LCD_RST: IC1.40 LCD1.1 | length 20.2
  Top Layer w0.2: LCD1.1 4.65,11.85 4.737,11.85 4.767,11.82 v1(14.8,11.82) ; IC1.40 14.8,20.945 v1(14.8,20.32)
  Bottom Layer w0.2: v1(14.8,11.82) v1(14.8,20.32)
LCD_SCK: IC1.63 LCD1.5 | length 51.7
  Top Layer w0.2: LCD1.5 2.95,21.61 2.95,17.145 4.005,16.09 6.85,16.09 9.786,13.154 33.097,13.154 v1(33.131,13.189) ; IC1.63 33.004,21.97 33.223,21.751 v1(33.331,21.751)
  Bottom Layer w0.2: v1(33.131,13.189) 33.166,13.223 33.166,17.349 33.366,17.549 33.366,21.717 v1(33.331,21.751)
LCD_SSEL: IC1.64 LCD1.2 | length 46.3
  Top Layer w0.2: LCD1.2 7.26,15.04 9.711,12.589 33.663,12.589 v1(33.697,12.623) ; IC1.64 33.636,22.47 33.789,22.317 v1(33.897,22.317)
  Bottom Layer w0.2: v1(33.697,12.623) 33.731,12.657 33.731,17.349 33.931,17.549 33.931,22.283 v1(33.897,22.317)
MISO: IC1.46 IC2.5 | length 13.8
  Top Layer w0.2: IC1.46 19.25,17.678 19.5,17.428 v1(19.5,15.92) ; v1(19.4,8.62) 21.6,8.62 21.963,8.257 21.963,7.907 IC2.5
  Bottom Layer w0.2: v1(19.4,8.62) 19.45,8.67 19.45,15.87 v1(19.5,15.92)
MOSI: IC1.45 IC2.11 | length 17.9
  Top Layer w0.2: IC1.45 18.75,16.978 18.823,16.905 18.823,16.597 v1(18.9,16.52) ; IC2.11 21.55,4.02 21.55,4.37 21.84,4.66 21.84,5.46 v1(21.9,5.52)
  Bottom Layer w0.2: v1(18.9,16.52) 18.9,16.412 18.8,16.312 18.8,7.271 20.551,5.52 v1(21.9,5.52)
NetC3_2: C3.2 IC1.19 Q1.1 | length 8.7
  Top Layer w0.2: C3.2 17.15,38.67 Q1.1 17.25,38.57 IC1.19
NetC4_2: C4.2 FB2.2 IC2.1 | length 4.2
  Top Layer w0.2: IC2.1 C4.2 26.66,6.53 26.66,6.955 27.45,7.745 FB2.2
NetC5_2: C5.2 C6.2 C7.2 FB1.2 IC2.8 IC2.9 | length 9.5
  Top Layer w0.2: FB1.2 19.45,1.92 19.1,2.27 19.1,2.795 C7.2 18.75,3.295 C6.2 ; IC2.9 18.95,5.22 C6.2 ; IC2.8 19.05,6.22 C5.2 C6.2
NetC8_2: C8.2 IC1.20 Q1.2 | length 10.2
  Top Layer w0.2: C8.2 13.15,38.67 Q1.2 13.1,38.37 16.75,34.72 IC1.20
NetC9_2: C9.2 C11.2 C12.2 C13.2 C14.2 FB3.1 IC1.21 IC1.42 IC1.56 IC1.77 | length 57.3
  Top Layer w0.2: v1(11.8,30.42) 12.75,30.42 C11.2 13.03,30.6 14.069,30.6 14.199,30.47 IC1.21 ; C12.2 17.5,17.661 17.25,17.911 IC1.42 17.231,19.014 17.231,19.841 17.1,19.971 17.1,20.469 19.951,23.32 23.2,23.32 ; v1(17.5,27.82) 26,27.82 ; C13.2 24.299,18.344 24.25,18.393 IC1.56 24.231,19.014 24.231,19.841 24,20.071 24,23.32 23.2,23.32 ; 28.8,32.72 28.3,32.72 26,30.42 26,27.82 ; FB3.1 FB3.1@30.407,34.363 ; C14.2 29.659,29.22 29.409,28.97 IC1.77 28.206,28.951 27.406,28.951 26.275,27.82 26,27.82 ; 23.2,23.32 23.2,24.52 26,27.32 26,27.82
  Top Layer w0.4: 28.8,32.72 C9.2 30.412,32.732 30.412,34.358 FB3.1@30.407,34.363
  Bottom Layer w0.2: v1(11.8,30.42) 14.4,27.82 v1(17.5,27.82)
NetC15_2: C15.2 FB4.1 IC1.10 | length 6
  Top Layer w0.2: C15.2@20.6,34.545 21.731,33.414 21.731,32.464 IC1.10 ; C15.2 21.321,34.545 21.746,34.97 21.746,35.413 22.565,36.232 22.565,36.87 22.865,37.17 FB4.1
NetC16_2: C16.2 C17.2 IC1.34 IC1.67 | length 18
  Top Layer w0.2: C16.2 12.649,23.97 IC1.34 14.79,23.985 22.185,23.985 v1(22.2,24) ; v1(24.6,24.02) 24.631,23.989 28.206,23.989 IC1.67 28.827,23.97 28.877,24.02 C17.2
  Bottom Layer w0.2: v1(22.2,24) 22.21,24.01 24.59,24.01 v1(24.6,24.02)
NetC19_2: C19.2 FB6.2 LCD1.6 | length 4.6
  Top Layer w0.2: LCD1.6 6.795,25.2 C19.2 6.825,25.195 7.25,25.62 FB6.2
NetC20_2: C20.2 F1.2 FB7.1 | length 3.5
  Top Layer w0.5: F1.2 6.025,44.614 6.35,44.939 7.469,44.939 7.55,44.859 C20.2
NetC25_2: C25.2 D1.2 IC3.1 R19.1 R21.2 | length 13.3
  Top Layer w0.2: R21.2@11.22,52.55 R21.2 10.9,52.55 11.05,52.7 R19.1 ; D1.2 12.817,50.5 12.517,50.8 12.517,51.083 12.5,51.1 R19.1 ; IC3.1 18.7,51.52 17.945,52.275 17.6,52.275 17.175,52.7 C25.2 17.175,53.021 16.75,53.446 16.307,53.446 15.828,53.925 13.65,53.925 12.5,52.775 R19.1
NetF1_1: F1.1 USB1.1 | length 6.1
  Top Layer w0.5: F1.1 3.175,44.02 5.325,41.87 5.325,40.133 4.662,39.47 USB1.1@4.575,39.47
NetIC1_75: IC1.75 R3.2 | length 30.4
  Top Layer w0.2: IC1.75 34.242,27.97 34.492,28.22 v1(34.6,28.22) ; v1(34.9,39.7) 39.18,39.7 41.3,41.82 46.025,41.82 R3.2
  Bottom Layer w0.2: v1(34.6,28.22) 34.6,29.069 34.4,29.269 34.4,39.183 34.9,39.683 v1(34.9,39.7)
NetIC1_76: IC1.76 R2.2 | length 30.9
  Top Layer w0.2: IC1.76 29.99,28.47 30.04,28.42 33.551,28.42 33.951,28.82 v1(34,28.82) ; v1(34.1,40.1) 34.208,40.1 34.408,40.3 39.18,40.3 42.609,43.729 46.025,43.729 R2.2
  Bottom Layer w0.2: v1(34,28.82) 34,39.783 34.023,39.806 34.023,40.023 v1(34.1,40.1)
NetLCD1_7: LCD1.7 R5.1 | length 8.2
  Top Layer w0.2: LCD1.7 2.95,26.69 2.95,24.765 4.005,23.71 4.461,23.71 6.439,21.732 R5.1
NetLED1_2: LED1.2 R2.1 | length 1.5
  Top Layer w0.2: R2.1 47.435,43.839 48.865,43.839 LED1.2
NetLED2_2: LED2.2 R3.1 | length 1.5
  Top Layer w0.2: R3.1 47.432,41.914 48.886,41.914 LED2.2
NetLED3_2: LED3.2 R20.1 | length 1.6
  Top Layer w0.2: R20.1 33.86,47.985 35.385,47.985 LED3.2
NetP2_1: P2.1 R7.1 | length 5.4
  Top Layer w0.2: R7.1 50.085,18.02 51.745,19.68 P2.1
NetP2_2: P2.2 R8.2 | length 2.3
  Top Layer w0.2: R8.2 48.21,19.68 P2.2
NetP2_3: P2.3 R9.1 | length 5.2
  Top Layer w0.2: R9.1 51.6,21.02 P2.3
NetP2_4: P2.4 R10.2 | length 2.3
  Top Layer w0.2: R10.2 48.35,22.22 P2.4
NetP2_5: P2.5 R11.1 | length 5.3
  Top Layer w0.2: R11.1 49.367,24.02 49.677,23.71 51.75,23.71 P2.5
NetP2_6: P2.6 R12.2 | length 2.5
  Top Layer w0.2: R12.2 49.5,25.52 P2.6
NetP2_7: P2.7 R13.1 | length 5.5
  Top Layer w0.2: R13.1 49.055,27.02 49.825,26.25 51.75,26.25 P2.7
NetP2_8: P2.8 R15.2 | length 2.7
  Top Layer w0.2: R15.2 49.04,28.52 P2.8
NetQ2_3: Q2.3 R5.2 | length 1.7
  Top Layer w0.2: R5.2 6.589,20.432 6.901,20.12 Q2.3
PIO0: IC1.69 R7.2 ZD1.3 | length 25.3
  Top Layer w0.2: IC1.69 32.21,24.97 35.684,21.496 35.684,19.386 39.158,15.912 44.802,15.912 44.81,15.904 ZD1.3@44.81,15.704 ; ZD1.3 ZD1.3@44.81,15.704 ; R7.2 46.45,17.72 46.45,17.344 ZD1.3@44.81,15.704
PIO1: IC1.70 R8.1 ZD8.3 | length 22.7
  Top Layer w0.2: IC1.70 32.276,25.47 36.084,21.662 36.084,20.787 38.791,18.081 ZD8.3 45.386,18.081 46.75,19.445 R8.1
PIO2: IC1.71 R9.2 ZD2.3 | length 21.1
  Top Layer w0.2: IC1.71 33.208,25.97 38.774,20.404 45.21,20.404 45.718,20.912 45.942,20.912 46.05,21.02 R9.2
PIO3: IC1.72 R10.1 ZD7.3 | length 20.2
  Top Layer w0.2: IC1.72 34.007,26.47 37.818,22.66 41.547,22.66 ZD7.3@41.686,22.52 ; ZD7.3 ZD7.3@41.686,22.52 ; R10.1 ZD7.3@41.686,22.52
PIO4: IC1.73 R11.2 ZD3.3 | length 19.7
  Top Layer w0.2: IC1.73 36.591,26.97 38.857,24.704 ZD3.3 45.994,24.02 R11.2
PIO5: IC1.74 R12.1 ZD6.3 | length 19.4
  Top Layer w0.2: IC1.74 36.657,27.47 37.107,27.02 ZD6.3 45.325,27.02 46.75,25.595 R12.1
RESET: C2.2 IC1.14 R1.1 SWD1.10 TP1.1 | length 31.2
  Top Layer w0.2: v1(19.4,34.12) 19.75,33.77 IC1.14 ; v1(26.6,41.7) 27.384,42.484 33.764,42.484 TP1.1 36.787,45.507 38.062,45.507 39.475,46.92 C2.2 ; SWD1.10 39.36,46.96 R1.1
  Bottom Layer w0.2: v1(19.4,34.12) 19.4,35.245 20.875,36.72 21.62,36.72 v1(26.6,41.7)
RX: IC1.59 R13.2 | length 38.1
  Top Layer w0.2: IC1.59 25.75,16.804 27.034,15.52 35.649,15.52 35.772,15.643 36.123,15.643 v1(36.2,15.72) ; v1(36.4,29.22) 40.767,29.22 41.891,28.096 45.749,28.096 46.75,27.095 R13.2
  Bottom Layer w0.2: v1(36.2,15.72) 36.2,15.828 36.4,16.028 v1(36.4,29.22)
SCK: IC1.47 IC2.10 | length 16
  Top Layer w0.2: IC1.47 19.75,17.744 20.1,17.394 v1(20.1,16.52) ; IC2.10 20.6,4.37 20.724,4.37 21.012,4.658 21.3,4.946 21.3,6.612 21.5,6.812 v1(21.5,6.92)
  Bottom Layer w0.2: v1(20.1,16.52) 20.1,8.295 21.475,6.92 v1(21.5,6.92)
SHLD: C26.2 ESD1.1 ESD2.1 R22.2 USB1.6 USB1.7 USB1.8 USB1.9 | length 5.1
  Top Layer w0.2: R22.2 C26.2
  Top Layer w0.5: v1(6.2,41.72) 6.219,41.701 6.219,40.851 ESD1.1
  Bottom Layer w0.5: USB1.9 5.25,41.72 v1(6.2,41.72)
SSEL: IC1.48 IC2.2 | length 16.5
  Top Layer w0.2: IC1.48 20.25,17.81 20.7,17.36 v1(20.7,15.92) ; v1(20.7,9.82) 24.049,9.82 25.6,8.269 25.6,7.771 25.199,7.37 24.9,7.37 IC2.2
  Bottom Layer w0.2: v1(20.7,9.82) v1(20.7,15.92)
SWCLK: IC1.5 R16.2 SWD1.4 | length 32.1
  Top Layer w0.2: IC1.5 24.25,33.27 25.407,34.427 v1(27.393,34.427) ; v1(28.1,41.3) 38.914,41.3 42.76,45.146 42.76,46.33 42.975,46.545 43.05,46.545 43.35,46.845 R16.2 43.17,47.1 SWD1.4
  Bottom Layer w0.2: v1(27.393,34.427) 27.393,37.275 27.7,37.582 27.7,40.851 28.1,41.251 v1(28.1,41.3)
SWDIO: IC1.3 R6.1 SWD1.2 | length 34.1
  Top Layer w0.2: IC1.3 25.25,33.27 25.7,33.72 v1(28.1,33.72) ; v1(29.2,40.7) 38.88,40.7 43.2,45.02 44.549,45.02 45.35,45.821 45.35,46.37 45.546,46.566 ; SWD1.2 45.35,48.075 45.35,46.762 45.546,46.566 ; R6.1 45.642,46.47 45.546,46.566
  Bottom Layer w0.2: v1(28.1,33.72) 28.1,39.6 v1(29.2,40.7)
TX: IC1.60 R15.1 | length 37.2
  Top Layer w0.2: IC1.60 26.25,16.87 27.2,15.92 31.146,15.92 31.446,16.22 v1(35.5,16.22) ; v1(35.9,29.92) 43.414,29.92 44.814,28.52 R15.1
  Bottom Layer w0.2: v1(35.5,16.22) 35.5,29.471 35.9,29.871 v1(35.9,29.92)
USB_N: ESD1.2 IC1.23 R17.1 | length 16.5
  Top Layer w0.3: ESD1.2 R17.1 7.65,39.145 8.075,38.72 8.707,38.72 16.378,31.049 16.378,30.084 15.764,29.47 IC1.23
USB_P: ESD2.2 IC1.22 R18.1 | length 14.8
  Top Layer w0.3: ESD2.2 R18.1 7.65,37.795 8.075,38.22 8.5,38.22 15.878,30.842 15.878,30.291 15.557,29.97 IC1.22
VDDA: C18.1 FB5.2 IC1.8 | length 4.6
  Top Layer w0.2: IC1.8 22.75,33.809 23.457,34.515 24.23,34.515 24.659,34.945 24.659,35.429 FB5.2
pads on no net: IC1.1 IC1.2 IC1.4 IC1.7 IC1.11 IC1.13 IC1.15 IC1.16 IC1.17 IC1.18 IC1.25 IC1.26 IC1.27 IC1.28 IC1.29 IC1.30 IC1.31 IC1.32 IC1.35 IC1.36 IC1.44 IC1.49 IC1.50 IC1.51 IC1.52 IC1.53 IC1.54 IC1.55 IC1.58 IC1.65 IC1.68 IC1.79 IC1.80 SWD1.6 SWD1.7 SWD1.8 USB1.0 USB1.4 ZD1.2 ZD2.2 ZD3.2 ZD4.2 ZD5.2 ZD6.2 ZD7.2 ZD8.2 ZD9.2

## Polygon pours and split planes (outlines as drawn)
GND on Top Layer "GND_TOP" (solid, remove dead copper, pour order 7): 0.5,54.5 0.5,0.5 54.5,0.5 54.5,54.5
NetC9_2 on Top Layer "MCU_3V3" (solid, remove dead copper, pour order 4): 30.9,33.4 19.6,33.4 17.1,30.9 17.1,29.4 16.1,28.4 13.8,28.4 13.8,18 29.2,18 29.2,29 27.6,30.6 27.6,31.4 28.2,32 30.9,32
SHLD on Top Layer "SHLD_L01_P006" (solid, pour order 6): 0.6,42.12 7.8,42.12 7.8,34.12 0.6,34.12
GND on Bottom Layer "GND_BOTTOM" (solid, remove dead copper, pour order 5): 0.5,54.5 0.5,0.5 54.5,0.5 54.5,54.5

## Keep-outs
Top Layer:
  lines w0.15: 16.4,32.8 16.4,33.4 15.5,34.3 14.6,34.3 11.3,37.6 11.3,42.2 19.4,42.2 19.4,37.1 17.6,35.3 17.6,32.8
Bottom Layer:
  lines w0.15: 16.4,32.8 16.4,33.4 15.5,34.3 14.6,34.3 11.3,37.6 11.3,42.2 19.4,42.2 19.4,37.1 17.6,35.3 17.6,32.8 ; 16.4,32.82 16.4,33.42 15.5,34.32 14.6,34.32 11.3,37.62 11.3,42.22 19.4,42.22 19.4,37.12 17.6,35.32 17.6,32.82
Keep-Out Layer:
  circle w0.254: c5,5 r3.5
  circle w0.254: c50,5 r3.5
  circle w0.254: c50,50.62 r3.5
  circle w0.254: c5,50.62 r3.5

## Other copper
Top Layer:
  region net 3V3: 21.5,54.5 21.5,45.62 31.5,45.62 31.5,49.62 34,49.62 34,54.5

## Silkscreen, mask and mechanical layers (free items; w line width, h text height)
Top Overlay:
  lines w0.15: 46.1,17.2 46.075,17.2 ; 48.763,16.488 48.7,16.488 48.7,17.2 ; 46.075,17.2 48.7,17.2 ; 46.075,17.2 46.075,29.525 48.7,29.525 48.7,17.2 ; 46.1,7.15 47.05,7.15 48.775,8.875 48.775,16.5 48.75,16.475 46.1,16.475 46.1,7.15
  lines w0.25: 26.475,51.945 27.275,52.745 ; 28.075,51.945 27.275,52.745 ; 29.675,48.745 30.475,49.545 ; 29.675,50.345 30.475,49.545 ; 27.275,52.745 27.275,49.545 30.475,49.545
  text "Y" at 27.875,52.845 h2 r90
  text "μShake" at 28.85,51.25 h2
  text "X" at 30.575,48.945 h2
  text "3V3" at 32.675,45.925 h1.52 r90
  text "ERROR" at 47.6,44.92 h2
  text "5V" at 14.025,43.775 h1.52
  text "RESET" at 34.4,41.95 h1.52
  text "OK" at 48.425,39.525 h2
  text "ISP" at 11.775,18.2 h1.52
  text "Rev 1.3 / Projektna naloga KEN / December 2021 / JR" at 33.125,1.675 h1.3
Board outline:
  the board outline again, w0.15

## Text inside footprints (layer, text, board x,y; h text height)
LED1: Top Overlay "K" at 51.176,44.102 h0.5 r180
LED2: Top Overlay "K" at 51.193,42.161 h0.5 r180
LED3: Top Overlay "K" at 35.654,45.669 h0.5 r90
P2: Top Overlay "13" at 53.308,36.952 h1.27 r90; Top Overlay "14" at 50.768,36.952 h1.27 r90; Top Overlay "1" at 53.308,16.632 h1.27 r90; Top Overlay "2" at 50.768,16.632 h1.27 r90
SWD1: Top Overlay "10" at 37.075,48.4 h0.7; Top Overlay "9" at 37.65,49.8 h0.7; Top Overlay "2" at 45.625,48.25 h0.7; Top Overlay "1" at 45.75,49.9 h0.7